# Altium PCB Плата 0312-1546 2.PcbDoc
Units mm, origin at the board's own origin, x right, y up, seen from the top; angles counter-clockwise.
Board outline 112 x 83.5 mm, 2 copper layers (Top Layer, Bottom Layer); 95 components, 62 nets, 367 pads, 73 vias.
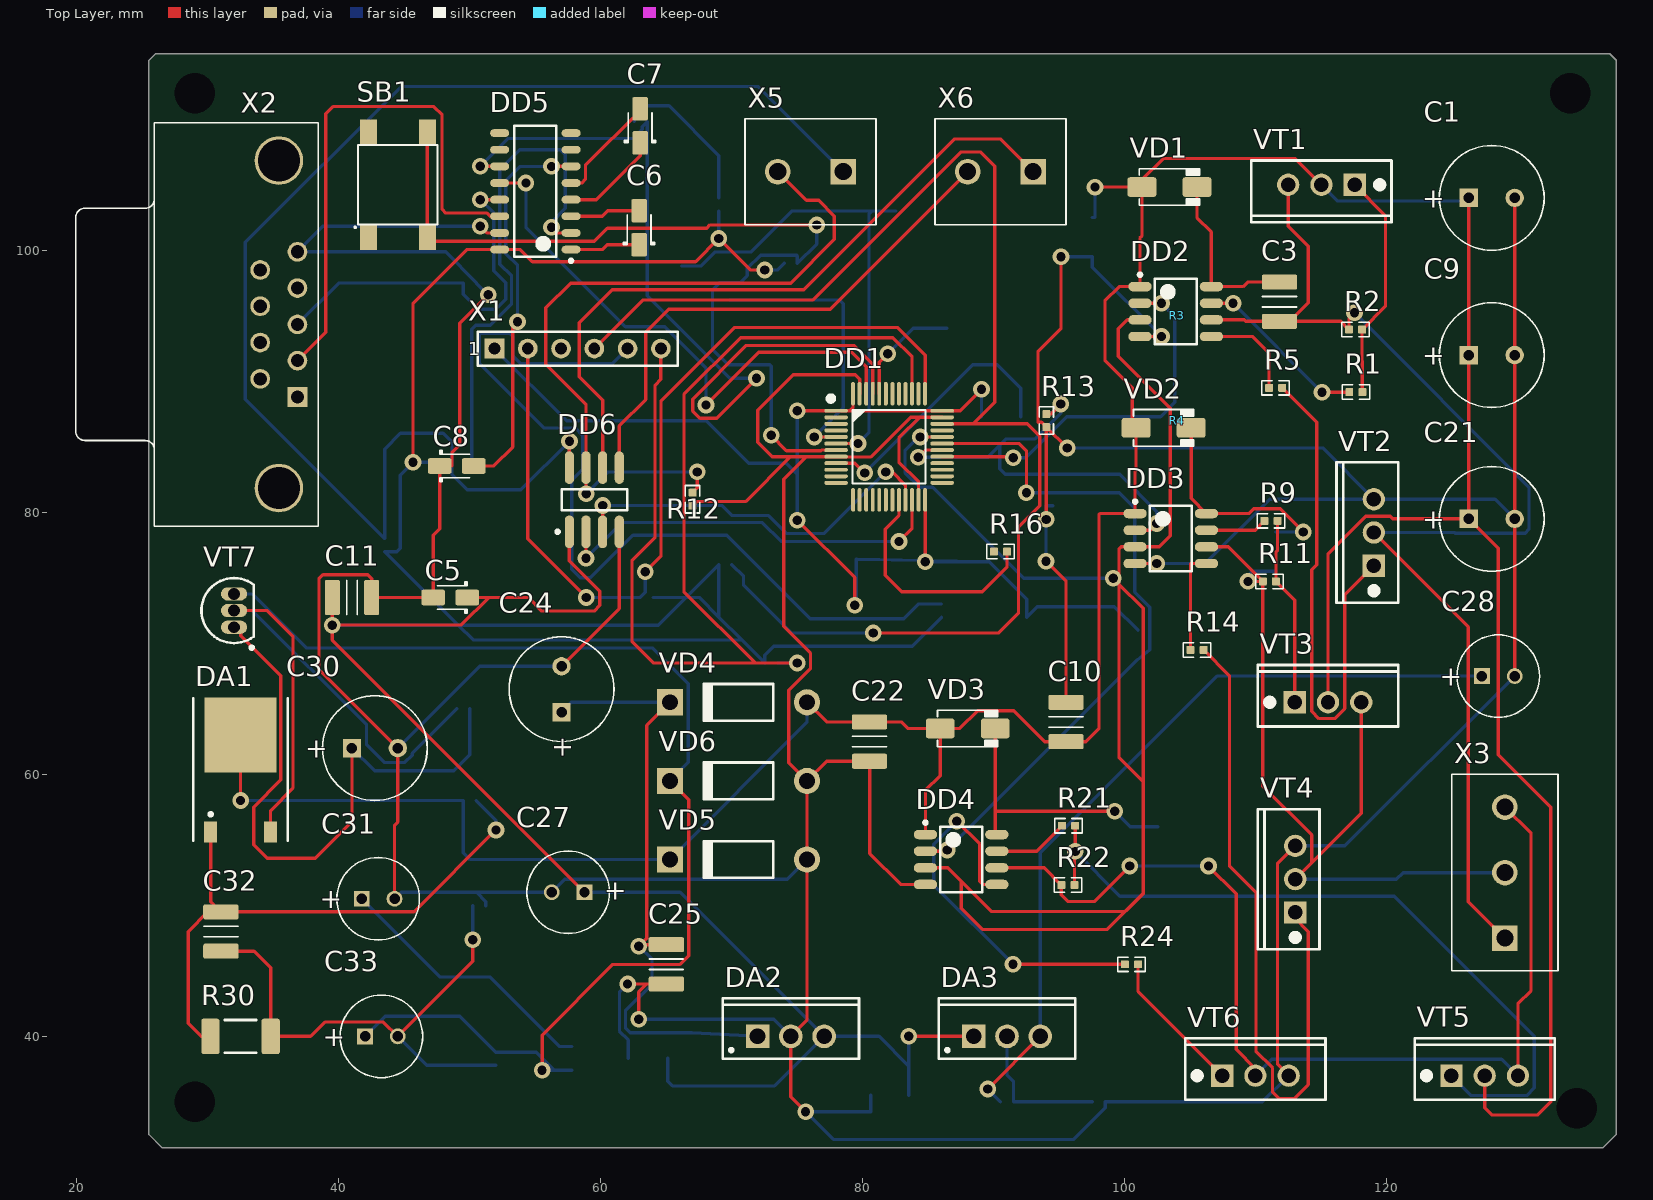
[diagram p0: Top Layer view]
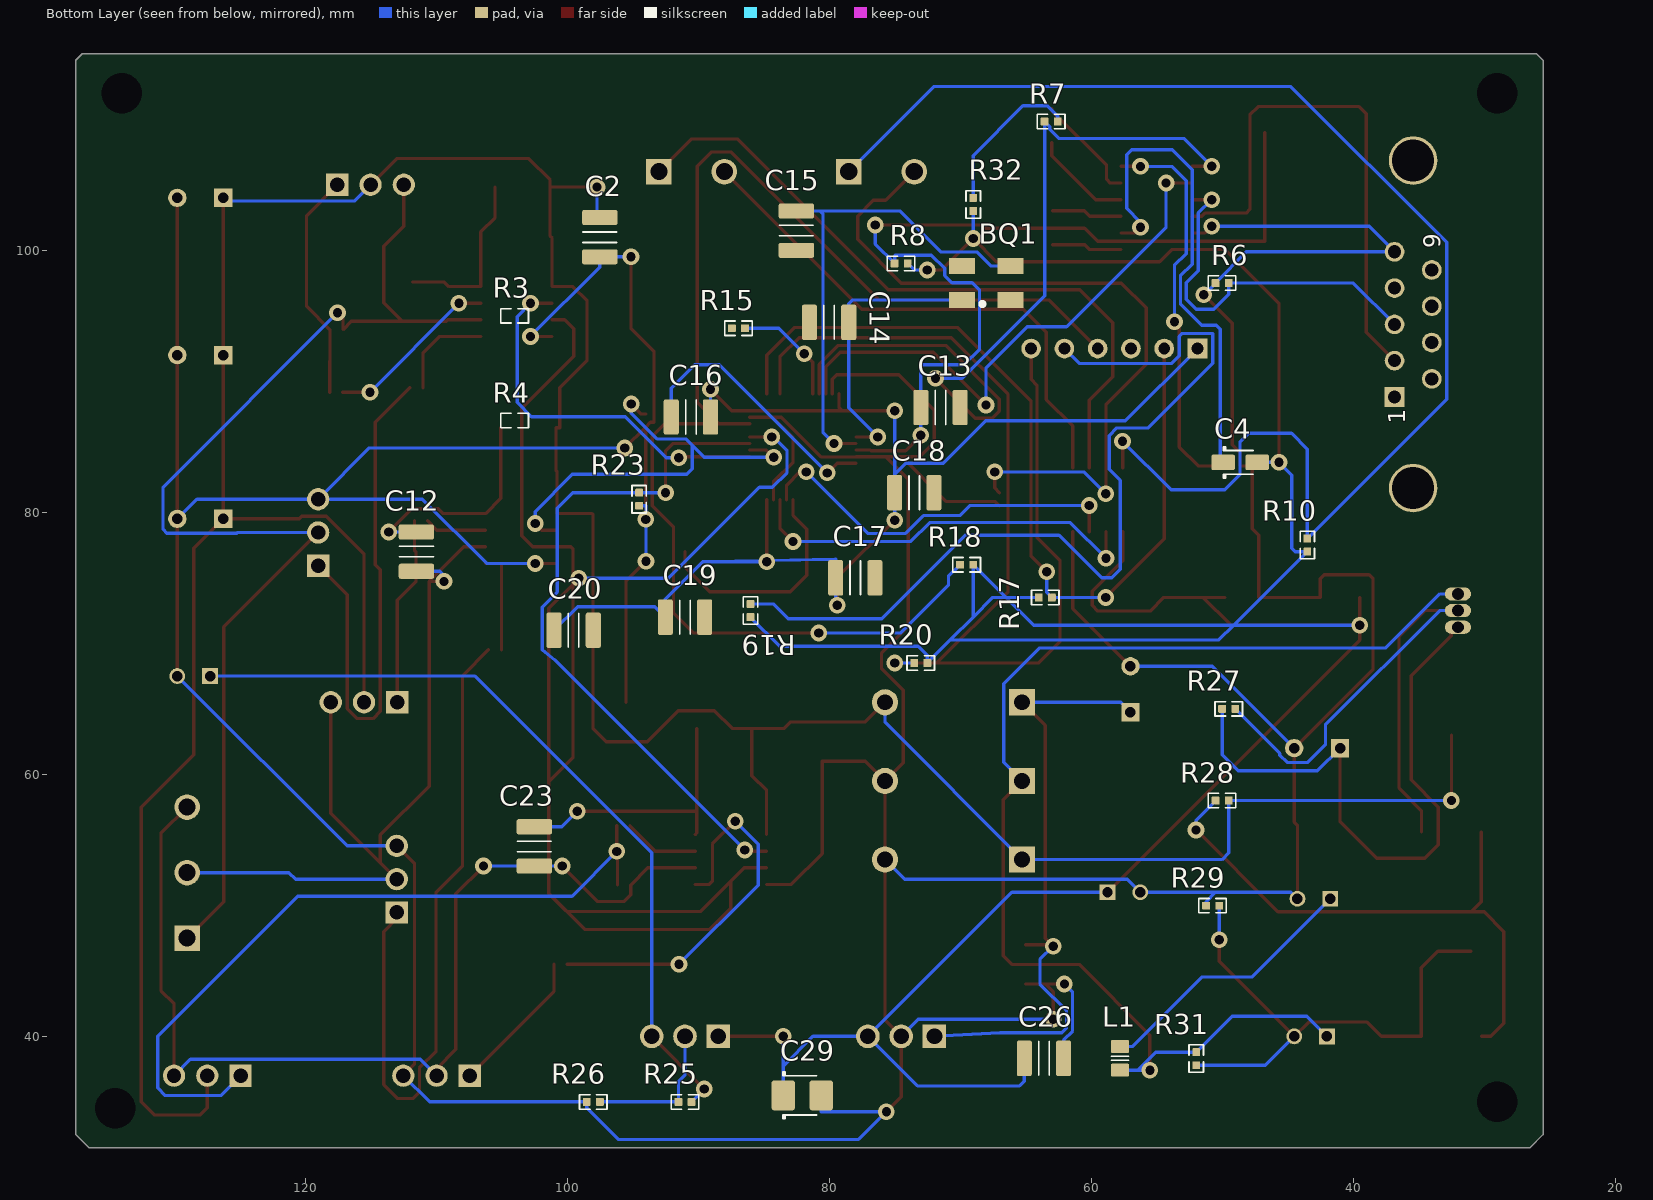
[diagram p1: Bottom Layer view, seen from below]
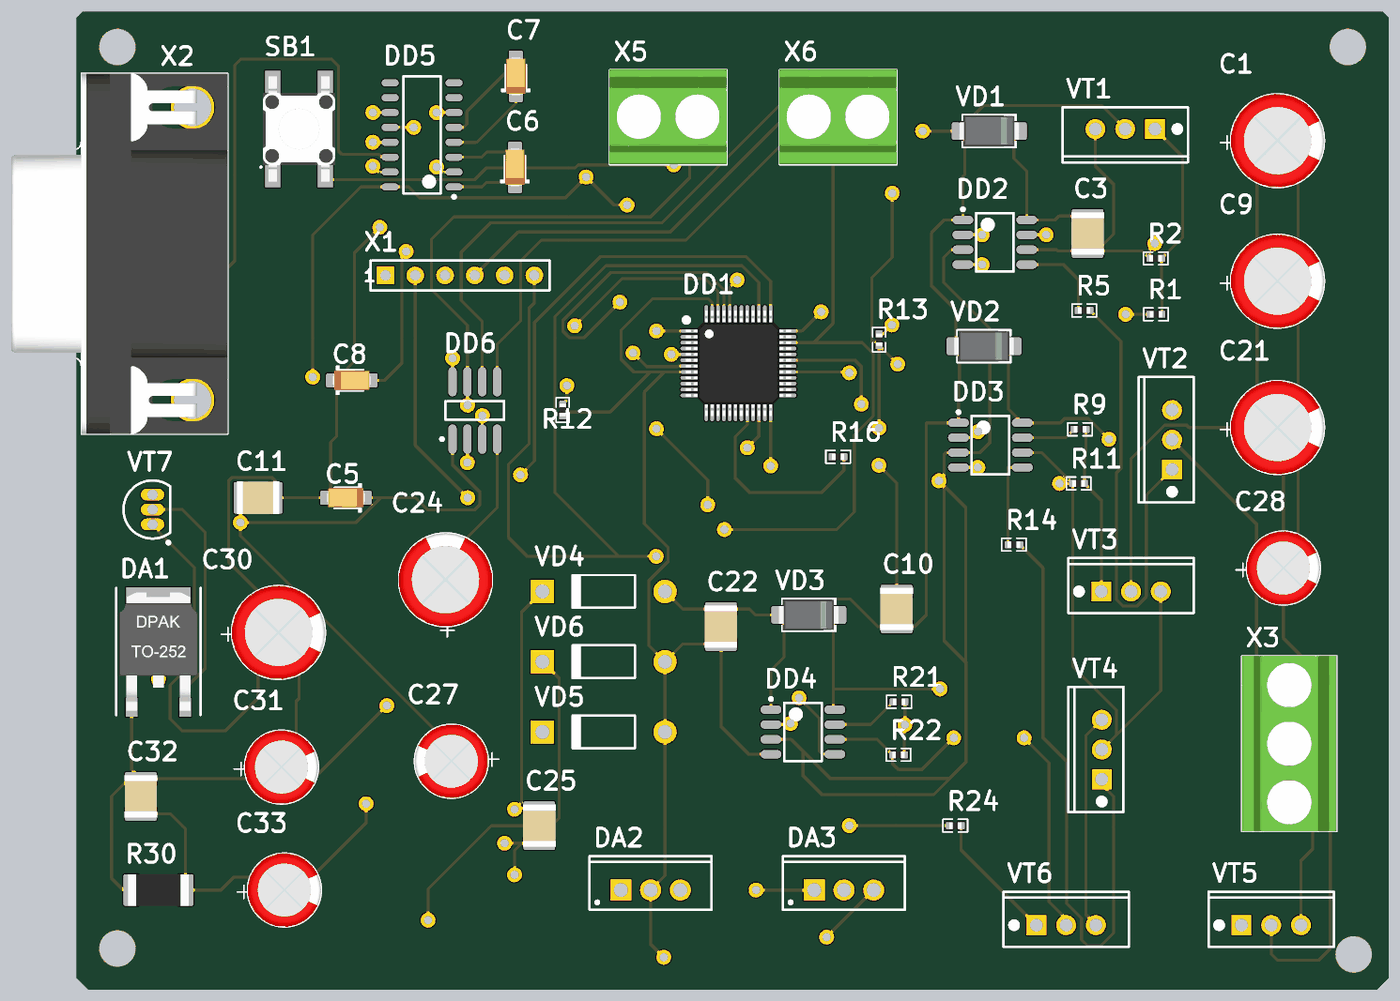
[diagram p2: 3D render of the assembled board from above, using the file's embedded part models]
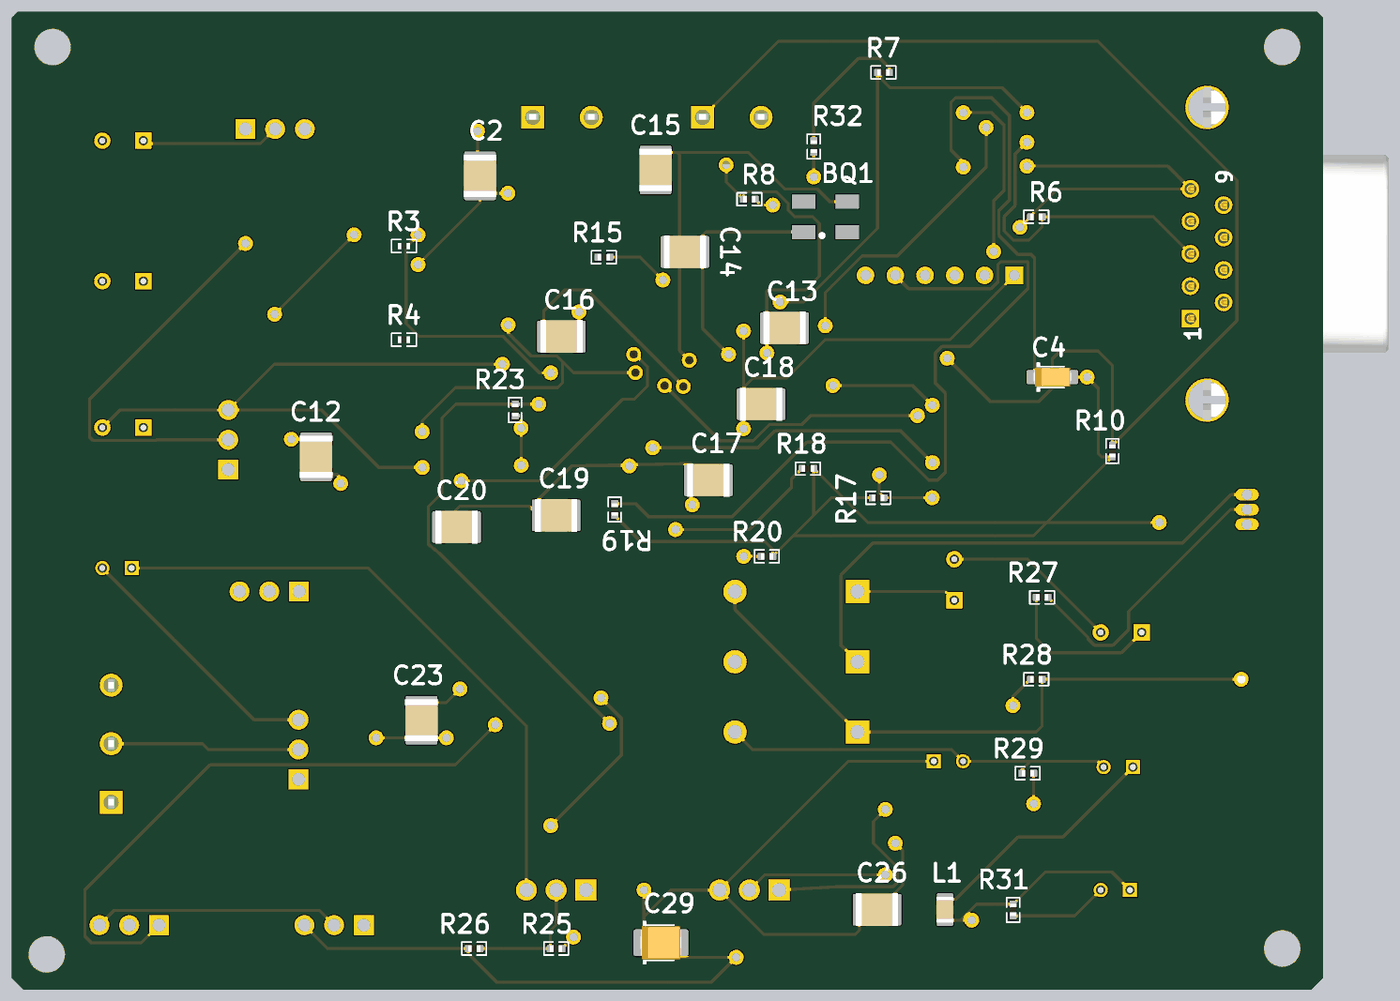
[diagram p3: 3D render of the assembled board from below, using the file's embedded part models]

## Layer stack, top to bottom
Top Solder: solder mask 0.0102, Solder Resist, Dk 3.5
Top Layer: signal copper 0.0356
Dielectric 1: dielectric 0.32, FR-4, Dk 4.8
Bottom Layer: signal copper 0.0356
Bottom Solder: solder mask 0.0102, Solder Resist, Dk 3.5

## Board outline
25.5,32.5 25.5,38 25.5,114.5 26,115 137,115 137.5,114.5 137.5,32.5 136.5,31.5 26.5,31.5

## Design rules (kind name [scope] priority, off if disabled: settings)
Clearance [All] p1: gap=0.254 ignorepadtopadclearanceinfootprint=TRUE except(0: Arc-Hole Track-Hole SMDPad-Hole THPad-Hole Via-Hole Fill-Hole Poly-Hole Region-Hole Text-Hole; 0.2: Arc-Arc Arc-Track Arc-SMDPad Track-Track Track-SMDPad SMDPad-SMDPad)
DiffPairsRouting [All] p1 off: maxlimit=0.254 minlimit=0.254 mostfreqgap=0.254 toplayer_minwidth=0.381 toplayer_maxwidth=0.381 toplayer_prefwidth=0.381 bottomlayer_minwidth=0.381 bottomlayer_maxwidth=0.381 bottomlayer_prefwidth=0.381 maxuncoupledlength=12.7
PolygonConnect [All] p1: connectstyle=Relief reliefconductorwidth=0.254 reliefentries=4 polygonreliefangle="90 Angle" airgapwidth=0.254
RoutingVias [All] p1: holewidth=0.711 width=1.27 viastyle="Through Hole" minholewidth=0.711 minwidth=1.27 maxholewidth=0.711 maxwidth=1.27
SolderMaskExpansion [All] p1: expansion=0.102
Width [All] p1: maxlimit=0.254 minlimit=0.254 preferedwidth=0.254
29 further rules are at their usual default settings.

## Components (designator, comment, footprint, x,y, rotation, side; value= is the part's Value field where it differs from the comment)
BQ1 "8МГц" SMD0503_BQ 68,97.5 r180 bottom
C1 "220мк" "WCAP-ATUL 8x11.5x3.5x0.5" 128,104 r0 top
C2 "0,1мк" CAPC3225X220N 97.5,101 r270 bottom
C3 "15мк" CAPC3225X220N 111.8,96.075 r270 top
C4 "1мк" CAPMP3216X180N 48.625,83.812 r180 bottom
C5 "1мк" CAPMP3216X180N 48.5,73.5 r180 top
C6 "1мк" CAPMP3216X180N 62.925,101.725 r90 top
C7 "1мк" CAPMP3216X180N 63,109.5 r90 top
C8 "1мк" CAPMP3216X180N 49,83.537 r0 top
C9 "220мк" "WCAP-ATUL 8x11.5x3.5x0.5" 128,92 r0 top
C10 "0,1мк" CAPC3225X220N 95.5,64 r90 top
C11 "0,1мк" CAPC3225X220N 41,73.5 r180 top
C12 "15мк" CAPC3225X220N 111.5,77 r270 bottom
C13 "10мк" CAPC3225X220N 71.5,88 r180 bottom
C14 "22" CAPC3225X220N 80,94.5 r0 bottom
C15 "22" CAPC3225X220N 82.5,101.5 r270 bottom
C16 "0,1мк" CAPC3225X220N 90.55,87.275 r180 bottom
C17 "0,1мк" CAPC3225X220N 78,75 r180 bottom
C18 "0,1мк" CAPC3225X220N 73.5,81.5 r180 bottom
C19 "0,1мк" CAPC3225X220N 91,72 r180 bottom
C20 "0,1мк" CAPC3225X220N 99.5,71 r180 bottom
C21 "220мк" "WCAP-ATUL 8x11.5x3.5x0.5" 128,79.5 r0 top
C22 "0,1мк" CAPC3225X220N 80.5,62.5 r270 top
C23 "15мк" CAPC3225X220N 102.5,54.5 r270 bottom
C24 "220мк" "WCAP-ATUL 8x11.5x3.5x0.5" 57,66.5 r90 top
C25 "0,1мк" CAPC3225X220N 65,45.5 r270 top
C26 "0,1мк" CAPC3225X220N 63.6,38.325 r180 bottom
C27 "100мк" "WCAP-ATUL 6.3x11x2.5x0.5" 57.5,51 r180 top
C28 "100мк" "WCAP-ATUL 6.3x11x2.5x0.5" 128.5,67.5 r0 top
C29 "10мк" CAPMP3528X210N 82.05,35.5 r180 bottom
C30 "100 мк" "WCAP-ATUL 8x11.5x3.5x0.5" 42.75,62 r0 top
C31 "100 мк" "WCAP-ATUL 6.3x11x2.5x0.5" 43,50.5 r0 top
C32 "0,01 мк" CAPC3225X220N 31,48 r270 top
C33 "330 мк" "WCAP-ATUL 6.3x11x2.5x0.5" 43.25,40 r0 top
DA1 "LM317D2T-TR" 369A-13 32.5,59.3 r0 top
DA2 "L78S05CV" TO220FP 74.5,40 r0 top
DA3 "LM317AT/NOPB" TO220FP 91,40 r0 top
DD1 "STM32F103C8T6" LQFP-48_N 82,85 r0 top
DD2 "IR2184SPBF" IR2184SPBF 103.875,95.325 r0 top
DD3 "IR2184SPBF" IR2184SPBF 103.5,78 r0 top
DD4 "IR2184SPBF" IR2184SPBF 87.5,53.5 r0 top
DD5 "MAX232EPE" ST232BDR 55,104.5 r180 top
DD6 "SN75179BD" PCBComponent_1#1 59.5,81 r90 top
L1 "B82432-A1684-K" CAPC2012X135N 57.8,38.325 r90 bottom
R1 "10" RES0402#1 117.625,89.175 r0 top
R2 "10к" RES0402#1 117.6,93.95 r0 top
R3 "100к" RES0402#2 104,95 r180 top
R4 "100к" RES0402#2 104,87 r180 top
R5 "10" RES0402#1 111.5,89.5 r0 top
R6 "5,1к" RES0402#1 50,97.5 r180 bottom
R7 "200к" RES0402#1 63.05,109.825 r180 bottom
R8 "4,7к" RES0402#1 74.5,99 r180 bottom
R9 "10" RES0402#1 111.15,79.35 r0 top
R10 "4,7к" RES0402#1 43.5,77.5 r270 bottom
R11 "10к" RES0402#1 111.025,74.725 r0 top
R12 "4,7к" RES0402#1 67,81 r90 top
R13 "100к" RES0402#1 94,87 r90 top
R14 "10" RES0402#1 105.5,69.5 r0 top
R15 "1к" RES0402#1 86.925,94.05 r180 bottom
R16 "1к" RES0402#1 90.5,77 r0 top
R17 "4,7к" RES0402#1 63.5,73.5 r0 bottom
R18 "4,7к" RES0402#1 69.5,76 r180 bottom
R19 "4,7к" RES0402#1 86,72.5 r270 bottom
R20 "4,7к" RES0402#1 73,68.5 r180 bottom
R21 "10" RES0402#1 95.7,56.075 r0 top
R22 "10к" RES0402#1 95.65,51.55 r0 top
R23 "100к" RES0402#1 94.5,81 r90 bottom
R24 "10" RES0402#1 100.5,45.5 r0 top
R25 "240" RES0402#1 91,35 r180 bottom
R26 "390" RES0402#1 98,35 r180 bottom
R27 "22" RES0402#1 49.5,65 r180 bottom
R28 "240" RES0402#1 50,58 r180 bottom
R29 "100" RES0402#1 50.725,49.975 r180 bottom
R30 "2к" RES2010 32.5,40 r180 top
R31 "15к" RES0402#1 51.975,38.3 r90 bottom
R32 "200к" RES0402#1 69,103.5 r270 bottom
SB1 "SWT-34" SWT-34 44.5,105 r90 top
VD1 "VS-10MQ100-M3/5AT" DO-214AC 103.4,104.825 r0 top
VD2 "VS-10MQ100-M3/5AT" DO-214AC 102.95,86.45 r0 top
VD3 "VS-10MQ100-M3/5AT" DO-214AC 88,63.5 r0 top
VD4 "1N4007" DO-41 70.5,65.5 r180 top
VD5 "1N4007" DO-41 70.5,53.5 r180 top
VD6 "КД213А" DO-41 70.5,59.5 r180 top
VT1 "IRF1010NPBF" TO-220 115,105 r180 top
VT2 "IRF1010NPBF" TO-220 119,78.46 r90 top
VT3 "IRF1010NPBF" TO-220 115.5,65.5 r0 top
VT4 "IRF1010NPBF" TO-220 113,52 r90 top
VT5 "IRF1010NPBF" TO-220 127.46,37 r0 top
VT6 "IRF1010NPBF" TO-220 109.96,37 r0 top
VT7 "КТ818 (КТ825)" TO-92A 32,72.5 r0 top
X1 "PLS-1x6" PCBComponent_1#2 56.96,92.5 r0 top
X2 "DRB-9FB" DSUB1.385-2H9 35.42,81.845 r90 top
X3 "301-031-12" 301-031-12_3D 129,52.5 r90 top
X5 "301-021-12" 301-021-12_3D 76,106 r180 top
X6 "301-021-12" 301-021-12_3D 90.5,106 r180 top

## Footprints (in the part's own frame and the unit in brackets; to place one, negate y for a bottom-side part, rotate by r counter-clockwise, add the part's x,y. Pads: shape width x height; smd on the part's side, far side on the other; paste and mask are expansions set on the pad)
301-021-12_3D [mm] "Serie 2417 - 5.00 mm _ 2 pins"
  rect 1.95x1.95 hole 1.3: 1(-2.5,0)
  round 1.95 hole 1.3: 2(2.5,0)
  silkscreen extent -5,-4.05 5,4.05, body extent -5,-4.1 5,4, height 10.1
301-031-12_3D [mm] "Serie 2417 - 5.00 mm _ 3 pins"
  rect 1.95x1.95 hole 1.3: 1(-5,0)
  round 1.95 hole 1.3: 2(0,0) 3(5,0)
  silkscreen extent -7.5,-4.05 7.5,4.05, body extent -7.5,-4.05 7.5,4.05, height 10.1
369A-13 [mm] "D-PAK/TO-252-AA; 3 Leads (1 Cropped); Body 10.3 (inc. leads) x 6.7 mm (LxW max)"
  rect 1x1.6 smd: 1(-2.285,-3.7) 3(2.285,-3.7)
  rect 5.5x5.7 smd: 4(0,3.7)
  silkscreen extent -3.6,-4.35 3.6,6.5, body extent -3.37,-4 3.37,6.1, height 2.38
CAPC2012X135N [mm] "Chip Capacitor, Body 2.0x1.2mm, EIA 0805, IPC Medium Density"
  round 0.254 on Mech15: 0(0,0)
  rrect25% 1x1.4 smd: 1(-0.9,0) 2(0.9,0)
  Top Layer pour cut-out: -0.675,0.7 -0.475,0.9 0.475,0.9 0.675,0.7 0.675,-0.7 0.475,-0.9 -0.475,-0.9 -0.675,-0.7
  silkscreen extent -0.15,-0.65 0.15,0.65, body extent -1.1,-0.72 1.1,0.73, height 1.34
CAPC3225X220N [mm] "Chip Capacitor, Body 3.2x2.5mm, EIA 1210, IPC Medium Density"
  round 0.508 on Mech15: 0(0,0)
  rrect25% 1.15x2.7 smd: 1(-1.5,0) 2(1.5,0)
  silkscreen extent -0.4,-1.3 0.4,1.3, body extent -1.8,-1.4 1.8,1.4, height 2.19
CAPMP3216X180N [mm] "Capacitor, polarized, Molded Body, EIA 535BAAC size A; 3.20mm L X 1.60mm W X 1.80mm H"
  round 0.508 on Mech15: 0(0,0)
  rrect25% 1.8x1.2 smd: 1(-1.3,0) 2(1.3,0)
  silkscreen extent -1.3,-1.2 1,1.2, body extent -1.6,-0.8 1.6,0.8, height 1.8
CAPMP3528X210N [mm] "Molded body capacitor, Body 3.5x2.8mm, 1210, IPC Nominal settings"
  round 0.254 on Mech15: 0(0,0)
  rrect25% 1.8x2.3 smd: 1(-1.45,0) 2(1.45,0)
  Top Layer pour cut-out: -0.508,1.27 0.508,1.27 0.508,-1.27 -0.508,-1.27
  silkscreen extent -1.5,-1.8 1.1,1.8, body extent -1.75,-1.4 1.75,1.4, height 2.1
DO-41 [mm] "Diode, Axial; Body 5.2 x 2.7 mm (LxDia. max), Lead Dia. 0.86 mm (max)"
  round 2 hole 1.2: 1(-5.23,0)
  rect 2x2 hole 1.2: 2(5.23,0)
  silkscreen extent -2.65,-1.4 2.75,1.4
DO-214AC [mm] "JEDEC DO214 variation AC. SMA"
  round 0.508 on Mech15: 0(0,0)
  rrect25% 2.2x1.5 smd: 1(-2.1,0) 2(2.1,0)
  silkscreen extent -2.3,-1.4 2.3,1.4, body extent -2.6,-1.3 2.6,1.3, height 2.42
DSUB1.385-2H9 [mm] "Connector; D Subminiature; 9 Position; Right Angle; Pitch 1.385 mm"
  rect 1.5x1.5 hole 1: 1(6.96,-1.42)
  round 1.5 hole 1: 2(9.73,-1.42) 3(12.5,-1.42) 4(15.27,-1.42) 5(18.04,-1.42) 6(8.345,1.42) 7(11.115,1.42) 8(13.885,1.42) 9(16.655,1.42)
  round 3.7 hole 3.2: Z1(25,0) Z2(0,0)
  silkscreen extent -2.9,-3 27.9,15.5, body extent -2.9,-3 27.9,15.5, height 12.51
IR2184SPBF [mm] "SOIC, 8-Leads, Body 4,90x3,90mm, Pitch 1,27mm, IPC Medium Density"
  oval 1.78x0.72 smd: 1(-2.725,1.905) 2(-2.725,0.635) 3(-2.725,-0.635) 4(-2.725,-1.905) 5(2.725,-1.905) 6(2.725,-0.635) 7(2.725,0.635) 8(2.725,1.905)
  silkscreen extent -2.85,-2.5 1.6,2.94, body extent -2,-2.5 2,2.5, height 1.75
LQFP-48_N [mm] "Thin QFP, 48-Leads, Body 7x7mm, Pitch 0.5mm, IPC Medium Density"
  round 1 on Mech15: 0(0,0)
  oval 1.8x0.3 smd: 1(-4.05,2.75) 2(-4.05,2.25) 3(-4.05,1.75) 4(-4.05,1.25) 5(-4.05,0.75) 6(-4.05,0.25) 7(-4.05,-0.25) 8(-4.05,-0.75) 9(-4.05,-1.25) 10(-4.05,-1.75) 11(-4.05,-2.25) 12(-4.05,-2.75) 25(4.05,-2.75) 26(4.05,-2.25) 27(4.05,-1.75) 28(4.05,-1.25) 29(4.05,-0.75) 30(4.05,-0.25) 31(4.05,0.25) 32(4.05,0.75) 33(4.05,1.25) 34(4.05,1.75) 35(4.05,2.25) 36(4.05,2.75)
  oval 0.3x1.8 smd: 13(-2.75,-4.05) 14(-2.25,-4.05) 15(-1.75,-4.05) 16(-1.25,-4.05) 17(-0.75,-4.05) 18(-0.25,-4.05) 19(0.25,-4.05) 20(0.75,-4.05) 21(1.25,-4.05) 22(1.75,-4.05) 23(2.25,-4.05) 24(2.75,-4.05) 37(2.75,4.05) 38(2.25,4.05) 39(1.75,4.05) 40(1.25,4.05) 41(0.75,4.05) 42(0.25,4.05) 43(-0.25,4.05) 44(-0.75,4.05) 45(-1.25,4.05) 46(-1.75,4.05) 47(-2.25,4.05) 48(-2.75,4.05)
  silkscreen extent -4.64,-2.79 2.79,3.88, body extent -4.5,-4.5 4.5,4.5, height 1.59
PCBComponent_1#1 [mm]
  oval 2.5x0.7 smd: 1(-2.487,1.905) 2(-2.487,0.635) 3(-2.487,-0.635) 4(-2.487,-1.905) 5(2.413,-1.905) 6(2.413,-0.635) 7(2.413,0.635) 8(2.413,1.905)
  silkscreen extent -2.61,-2.5 0.76,2.93, body extent -2.04,-2.5 1.96,2.5, height 1.75
PCBComponent_1#2 [mm]
  rect 1.5x1.5 hole 0.9: 1(-5.08,0)
  round 1.5 hole 0.9: 2(-2.54,0) 3(0,0) 4(2.54,0) 5(5.08,0) 6(7.62,0)
  silkscreen extent -6.35,-1.3 8.92,1.27
RES0402#1 [mm] "Chip Resistor, Body 1.0x0.5mm, EIA 0402, IPC Medium Density"
  round 0.2 on Mech15: 0(0,0)
  rrect20% 0.6x0.6 smd: 1(-0.5,0) 2(0.5,0)
  Top Layer pour cut-out: -0.325,0.375 -0.2,0.5 0.2,0.5 0.325,0.375 0.325,-0.375 0.2,-0.5 -0.2,-0.5 -0.325,-0.375
  silkscreen extent -1.05,-0.55 1.05,0.55, body extent -0.52,-0.27 0.53,0.28, height 0.4
RES0402#2 [mm] "Chip Resistor, Body 1.0x0.5mm, EIA 0402, IPC Medium Density"
  round 0.2 on Mech15: 0(0,0)
  rrect20% 0.6x0.6 on Mech1: 1(-0.5,0) 2(0.5,0)
  body extent -0.52,-0.28 0.53,0.27, height 0.4
RES2010 [mm] "Chip Resistor, Body 5.0x2.5mm, 2010, IPC Medium Density"
  round 0.508 on Mech15: 0(0,0)
  rrect25% 1.4x2.7 smd: 1(-2.3,0) 2(2.3,0)
  silkscreen extent -1.2,-1.25 1.2,1.25, body extent -2.6,-1.35 2.6,1.35, height 0.69
SMD0503_BQ [mm]
  rect 2x1.2 smd: 1(-1.85,-1.3) 2(1.85,-1.3) 3(1.85,1.3) 4(-1.85,1.3)
  silkscreen extent -0.45,-1.75 -0.15,-1.45, body extent -2.5,-1.6 2.5,1.6, height 1
ST232BDR [mm]
  oval 1.45x0.6 smd: 1(-2.725,4.445) 2(-2.725,3.175) 3(-2.725,1.905) 4(-2.725,0.635) 5(-2.725,-0.635) 6(-2.725,-1.905) 7(-2.725,-3.175) 8(-2.725,-4.445) 9(2.725,-4.445) 10(2.725,-3.175) 11(2.725,-1.905) 12(2.725,-0.635) 13(2.725,0.635) 14(2.725,1.905) 15(2.725,3.175) 16(2.725,4.445)
  silkscreen extent -2.85,-5 1.6,5.42, body extent -2,-5 2,5, height 2.65
SWT-34 [mm] "6*6mm vertical type, SMD, height 4.3mm, black actuator, 160gf, T&R"
  rect 2x1.3 smd: 1(-3.975,2.25) 2(3.975,2.25) 3(-3.975,-2.25) 4(3.975,-2.25)
  silkscreen extent -3.29,-3.04 3.04,3.29, body extent -4.5,-3.1 4.5,3.1, height 4.29
TO220FP [mm] "TO, Thru-Hole, Vertical, Heatsink Mounted; 3 In-Line Leads; Pitch 2.54 mm"
  rect 1.8x1.8 hole 1.2: 1(-2.54,0)
  round 1.8 hole 1.2: 2(0,0) 3(2.54,0)
  silkscreen extent -5.2,-1.7 5.2,2.9, body extent -5.25,-1.75 5.25,2.95, height 20
TO-92A [mm] "TO, Flat Index; 3 In-Line, Axial Leads; Body Dia. 4.5mm; Leads 0.51 x 0.48 mm (max)"
  oval 2x1 hole 0.9: 1(0,-1.27) 2(0,0) 3(0,1.27)
  silkscreen extent -2.48,-2.95 1.5,2.48, body extent -2.48,-2.5 1.5,2.5, height 6.86
TO-220 [mm] "TO, Thru-Hole, Vertical, Heatsink Mounted; 3 In-Line Leads; Pitch 2.54 mm"
  rect 1.7x1.7 hole 1.1: 1(-2.54,0)
  round 1.7 hole 1.1: 2(0,0) 3(2.54,0)
  silkscreen extent -5.35,-1.85 5.35,2.85
"WCAP-ATUL 6.3x11x2.5x0.5" [mm] "Polarized capacitors, Aluminum Electrolytic Capacitors, 2-Leads, Body 6.3x11x2.5x0.5"
  rect 1.206x1.206 hole 0.8: 1(-1.25,0)
  round 1.206 hole 0.8: 2(1.25,0)
  silkscreen extent -3.15,-3.15 3.15,3.15, body extent -3.12,-3.13 3.14,3.15, height 19.51
"WCAP-ATUL 8x11.5x3.5x0.5" [mm] "Polarized capacitors, Aluminum Electrolytic Capacitors, 2-Leads, Body 8x11.5x3.5x0.5"
  rect 1.4x1.4 hole 0.8: 1(-1.75,0)
  round 1.4 hole 0.8: 2(1.75,0)
  silkscreen extent -4,-4 4,4, body extent -3.97,-3.98 3.99,4, height 11.76

## Part data
BQ1: library part SMD0503, "Кварцевый резонатор", ValueManufacturer=Китай, ValueDescription="Кварцевый резонатор", ValueManufacturerPartNumber=SMD0503, ValueType=SMD0503, ValueValue=8МГц
C1 C4 C5 C6 C7 C8 C9 C21 C24 C27 C28 C29 C30 C31 C33: library part Сapacitor_Pol, "Сapacitor_Pol", ValueDescription="Конденсатор полярный", ValueManufacturerPartNumber="\"\" -", ValueType_TU=Конденсаторы
C2 C3 C10 C11 C12 C13 C14 C15 C16 C17 C18 C19 C20 C22 C23 C25 C26 C32: library part Сapacitor, "Сapacitor", ValueDescription=Конденсатор, ValueManufacturerPartNumber="\"\" -", ValueType_TU=Конденсаторы
DA1: library part MC33269DT-3.3G, "Регулятор с малым падением напряжения, 800мА, 3.3В", ValueDescription="DC-DC регулятор", ValueManufacturer="ON Semiconductor", ValuePackage=369A-13, ValueManufacturerPartNumber=MC33269DT-3.3G, ValueType=MC33269DT-3.3G
DA2 DA3: library part L7805ABV, "Регулятор положительного напряжения, 1.5А, 5В", ValueDescription="Регулятор положительного напряжения", ValueManufacturer="ST Microelectronics", ValueManufacturerPartNumber=L7805ABV, ValueType=L7805ABV
DD1: "ARM Cortex-M3 32-bit MCU, 128 KB Flash, 20 KB Internal RAM, 37 I/Os, 48-pin LQFP, -40 to 85 degC, Tray", I/Os (High Current)=37, Operating Frequency(F) (Processor speed) (MHz)=72, Supplier Part Number 1=1606327, Supply Voltage(Vcc) min (V)=2, ValueManufacturer=STMicroelectronics, A/D Converter="2x12-bit (10 Channel)", ComponentLink1Description="Manufacturer URL", ComponentLink1URL=http://www.st.com/web/en/home.html, ComponentLink2Description=Datasheet, ComponentLink2URL=http://www.st.com/st-web-ui/static/active/en/resource/technical/document/datasheet/CD00161566.pdf, ComponentLink3Description="Package Specification", ComponentLink3URL=http://www.st.com/st-web-ui/static/active/en/resource/technical/document/datasheet/DM00058181.pdf, Core="ARM Cortex-M3", DatasheetVersion="Rev. 16", FLASH Size (Prog) (kB)=64, Internal RAM Size (kB)=20, Mounting Technology="Surface Mount", PackageDescription="48-Pin Low Profile Quad Flat Package, 7 x 7 mm Body, 0.5 mm Pitch", PackageReference=LQFP48, PackageVersion="Rev. 6, 06/2013", Packing=Tray, PartNumber=STM32F103C8T6, Supplier 1=Farnell, Supplier 2=Newark, Supplier 3=Newark, Supplier Part Number 2=11N8296, Supplier Part Number 3=57P1214, ValueManufacturerPartNumber=STM32F103C8T6, ValueType=STM32F103C8T6
DD2 DD3 DD4: library part Component_1
DD5: library part ST232BDR
DD6: "Дифференциальный драйвер и ресивер двухпроводной линии (RS-422)", ValueManufacturer="Texas Instruments", ValuePackage=SO-8, ValueDescription="Дифференциальный драйвер и ресивер двухпроводной линии (RS-422)", ValueManufacturerPartNumber=SN75179BD, ValueType=SN75179BD
L1: library part BLM21AG102SN1, "Дроссель подавления ЭМП", ValueCurrent="0,2 А", ValueManufacturer="Murata Manufacturing", ValuePackage=0805, ValueValue="20 мГн", ValueDescription="Дроссель подавления ЭМП", ValueManufacturerPartNumber=BLM21AG102SN1, ValueType=BLM21AG102SN1
R1 R2 R3 R4 R5 R6 R7 R8 R9 R10 R11 R12 R13 R14 R15 R16 R17 R18 R19 R20 R21 R22 R23 R24 R25 R26 R27 R28 R29 R30 R31 R32: library part Resistor, "Резистор", ValueManufacturerPartNumber="\"\" -", ValueType_TU=Резисторы, ValueDescription=Резистор
SB1: "Тактовый переключатель SMD h=7мм (SDTM-630-N) (TS-06M-CSM)", ValueDescription="Кнопка тактовая", ValueManufacturer=Тайвань, ValueManufacturerPartNumber=SWT-34, ValuePackage=SWT-34, ValueType=SWT-34
VD1 VD2 VD3: "Диод Шоттки 2.1А 100В", ValueCurrent=2,1А, ValueManufacturer="Fairchild Semiconductor", ValueMaxReverseVoltage=100В, ValuePackage=DO-214AC, ValueDescription="Диод Шоттки 2.1А 100В", ValueManufacturerPartNumber=VS-10MQ100-M3/5AT, ValueType=VS-10MQ100-M3/5AT
VD4 VD5 VD6: library part "Diode 1N4007", "1 Amp General Purpose Rectifier", Code_JEDEC=DO-204-AL, ComponentLink1Description="Manufacturer Link", ComponentLink1URL=http://www.fairchildsemi.com/, ComponentLink2Description=Datasheet, ComponentLink2URL=http://www.fairchildsemi.com/ds/1N%2F1N4001.pdf, DatasheetVersion=1998, LatestRevisionDate=17-Jul-2002, LatestRevisionNote="Re-released for DXP Platform.", PackageDescription="Diode, Axial; Body 5.2 x 2.7 mm (LxDia. max), Lead Dia. 0.86 mm (max)", PackageReference=DO-41, PackageVersion=Aug-1999, Published=8-Jun-2000, Publisher="Altium Limited"
VT1 VT2 VT3 VT4 VT5 VT6: library part IRLML0100TRPBF, "Транзистор, Nкан 100В 127А TO220AB", ValueCurrent=127А, ValueManufacturer="International Rectifier", ValueManufacturerPartNumber=IRFB4310PBF, ValuePackage=TO-220, ValueVoltage=100В, ValueDescription="Транзистор, Nкан 100В 127А TO220AB", ValueType=IRFB4310PBF
VT7: library part 2N3906, "PNP General Purpose Amplifier", ComponentLink1Description="Manufacturer Link", ComponentLink1URL=http://www.fairchildsemi.com/, ComponentLink2Description=Datasheet, ComponentLink2URL=http://www.fairchildsemi.com/ds/2N%2F2N3906.pdf, DatasheetVersion=1997, LatestRevisionDate=15-Jan-2003, LatestRevisionNote="PCB Footprint 'BCY-W3/D4.7' replaced", PackageDescription="TO, Flat Index; 3 In-Line, Axial Leads; Body Dia. 4.5mm; Leads 0.51 x 0.48 mm (max)", PackageReference=TO-92A, PackageVersion=Sep-1998, Published=8-Jun-2000, Publisher="Altium Limited"
X1: library part IDC-6MS, A1TXT=V_targ, A2TXT=SWCLK, A3TXT=GND, A4TXT=SWDIO, A5TXT=NRST, A6TXT=SWO, ValueManufacturerPartNumber=IDC-6MS, ValueType=IDC-6MS
X2: "Розетка 9 pin на плату 9.4мм", ValueManufacturer="Ningbo Zhenqin Electronic (Connfly Electronic)", A2TXT=Output, A3TXT=Input, A5TXT=GND, ValueDescription="Розетка 9 pin на плату 9.4мм", ValueManufacturerPartNumber=DRB-9FB, ValueType=DRB-9FB
X3: "Клеммник винтовой, 3-контактный, 5мм, прямой", ValueManufacturer="Ningbo Xinya M&E", A1TXT=PMW_A, A2TXT=PMW_B, A3TXT=PMW_C, ValueDescription="Клеммник винтовой, 3-контактный, 5мм, прямой", ValueManufacturerPartNumber=301-031-12, ValueType=301-031-12
X5 X6: "Клеммник винтовой, 2-контактный, 5мм, прямой", ValueManufacturer="Ningbo Xinya M&E", ValueDescription="Клеммник винтовой, 2-контактный, 5мм, прямой", ValueManufacturerPartNumber=301-021-12, ValueType=301-021-12
  X5: A1TXT=SIGN_A, A2TXT=SIGN_B
  X6: A1TXT=SIGN_Z, A2TXT=SIGN_Y

## Free pads (board coordinates)
  rect 0x0 hole 3.1: ""(29,35) ""(29,112) ""(134,112) ""(134.5,34.5)

## Via types
v1: diameter 1.27, hole 0.711, Top Layer to Bottom Layer, 73 vias

## Nets (pads, with @x,y where several pads share a name; then routed paths per layer and width w, separated by ;. In a path a pad name is that pad's centre, name@x,y a point inside that pad or via, vN(x,y) a via of type N, cw(c..) or ccw(c..) an arc to the next point about the centre after c; other vN are vias at no path point)
+3,3В: C28.1 DA3.3 R25.2 | length 60.4
  Top Layer w0.254: v1(89.52,35.98) DA3.3
  Bottom Layer w0.254: v1(89.52,35.98) R25.2 ; DA3.3 93.54,54.018 107.022,67.5 C28.1
+3.3В: C16.2 C17.1 C18.1 C19.1 C20.1 DD1.1 DD1.24 DD1.36 DD1.48 X1.1 | length 100.3
  Top Layer w0.254: v1(75,79.4) 79.375,75.025 v1(79.375,72.898) ; v1(75,87.75) DD1.1 78.994,87.75 ; DD1.48 79.25,88.006 78.994,87.75 ; v1(84.75,76.225) DD1.24 ; v1(89.052,89.383) 87.42,87.75 DD1.36 78.994,87.75
  Bottom Layer w0.254: X1.1 57.38,87 68.042,87 71.298,83.744 74.168,83.744 75,82.912 ; v1(75,79.4) C18.1 75,82.912 ; v1(75,87.75) 75,82.912 ; v1(79.375,72.898) 79.5,73.023 C17.1 79.5,76.429 79.529,76.428 84.752,76.324 89.655,76.225 ; v1(84.75,76.225) 89.655,76.225 ; C16.2 89.05,89.38 v1(89.052,89.383) ; C20.1 99.204,72.796 93.296,72.796 C19.1 92.5,73.381 89.655,76.225
+5В: C4.2 C5.1 C11.2 C26.1 C27.1 C29.1 DA2.3 DA3.1 DD5.16 DD6.1 R8.2 R10.2 R17.2 R18.2 R19.2 R20.2 R32.2 | length 265.6
  Top Layer w0.254: v1(45.663,83.812) 45.663,95.955 49.763,100.055 DD5.16 53.848,100.055 54.778,99.125 67.225,99.125 v1(69,100.901) 71.401,98.5 v1(72.5,98.5) ; C5.1 51.462,73.5 ; DD6.1 57.595,76.314 59.919,73.99 59.919,72.898 59.487,72.466 55.491,72.466 54.458,73.5 51.462,73.5 ; C27.1 39.5,70.25 v1(39.5,71.388) C11.2 39.511,71.399 49.361,71.399 51.462,73.5 ; v1(83.5,40) DA3.1
  Bottom Layer w0.254: v1(39.5,71.388) 49.112,71.388 ; C4.2 v1(45.663,83.812) 44.694,82.843 44.694,77.267 44.427,77 R10.2 49.112,71.388 ; C27.1 66.04,51 DA2.3 ; R17.2 66.5,73.5 ; C26.1 65.1,36.576 65.463,36.213 73.253,36.213 DA2.3 ; v1(69,100.901) R32.2 ; v1(72.5,98.5) 73.5,98.5 R8.2 ; C29.1 83.5,37.734 ; v1(83.5,40) 83.5,37.734 ; R19.2 83.765,69.765 73.177,69.765 72.5,69.088 R20.2 70.744,70.256 ; 49.112,71.388 64.388,71.388 66.5,73.5 ; 49.112,71.388 50.244,70.256 70.744,70.256 ; 66.5,73.5 67.5,73.5 69,72 ; 66.5,73.5 R18.2 69,72 ; 69,72 70.744,70.256 ; DA2.3 81.234,40 83.5,37.734
+12В: C1.1 C2.1 C9.1 C10.1 C21.1 C22.1 DA1.4 DD2.1 DD3.1 DD4.1 R28.2 VD1.1 VD2.1 VD3.1 VD4.1 VD5.2 VT1.2 VT3.2 VT5.2 | length 276.1
  Top Layer w0.254: v1(32.5,58) DA1.4 ; VD4.1 77.23,64 C22.1 82.931,64 83.431,63.5 VD3.1 ; DD4.1 84.775,58.775 85.9,59.9 VD3.1 ; v1(97.713,104.825) VD1.1 ; VT1.2 113,107 102.929,107 101.3,105.371 VD1.1 ; VT3.2 115.5,76.841 118.364,79.705 120.244,79.705 120.449,79.5 C21.1 ; C1.1 C9.1 C21.1 ; VT5.2 127.46,34.54 128,34 131.5,34 132.5,35 132.5,57.5 128.5,61.5 128.5,77.25 C21.1 ; VD3.1 87.401,63.5 88.764,64.862 91.525,64.862 93.888,62.5 C10.1 97.028,62.5 98.019,63.491 98.019,79.829 98.095,79.905 DD3.1 100.775,83.134 100.85,83.209 VD2.1 100.559,86.45 100.559,89.51 98.476,91.592 98.476,96.138 99.568,97.23 DD2.1 101.15,100.94 101.3,101.09 VD1.1
  Bottom Layer w0.254: v1(32.5,58) R28.2 49.5,54.005 50.005,53.5 VD5.2 75.73,63.96 VD4.1 ; C2.1 97.713,102.5 v1(97.713,104.825) ; VT1.2 116.241,103.759 126.009,103.759 C1.1
+27В: C30.1 R27.1 VT7.1 | length 47.7
  Top Layer w0.254: VT7.1 32.512,71.23 32.512,70.587 35.577,67.522 35.577,59.577 33.5,57.5 33.5,54.638 34.544,53.594 38.206,53.594 41,56.388 C30.1
  Bottom Layer w0.254: C30.1 42.726,60.274 48.768,60.274 50,61.506 R27.1
BOOT1: DD1.20 R16.2 | length 17.9
  Top Layer w0.254: DD1.20 82.75,79.756 81.712,78.718 81.712,75.184 82.956,73.939 89.099,73.939 91,75.84 R16.2
BOOTO: DD1.44 R15.2 | length 8.7
  Top Layer w0.254: DD1.44 81.25,91.461 v1(81.89,92.1)
  Bottom Layer w0.254: v1(81.89,92.1) 83.839,94.05 R15.2
GND: C1.2 C2.2 C5.2 C8.1 C9.2 C10.2 C11.1 C21.2 C22.2 C24.2 C25.2 C26.2 C27.2 C28.2 C29.2 C30.2 C31.2 DA2.2 DD1.8 DD1.23 DD1.35 DD1.47 DD2.4 DD3.4 DD4.4 DD5.15 DD6.4 R6.1 R12.1 R13.1 R23.1 R26.1 R29.1 VD5.1 VD6.1 VT2.3 VT4.3 VT6.3 X2.5 | length 529.1
  Top Layer w0.254: C31.2 44.25,56.109 44.5,56.359 C30.2 38.481,68.019 38.481,74.93 38.786,75.235 42.195,75.235 42.5,74.93 C11.1 C5.2 47.2,78.257 47.7,78.757 C8.1 48.641,83.537 48.641,84.582 49.225,85.166 49.225,94.437 v1(51.394,96.606) ; v1(50.8,101.829) 51.304,101.325 DD5.15 ; C24.2 61.405,72.655 DD6.4 ; v1(62.039,44) 63.5,44 ; v1(62.89,41.3) 62.89,43.39 63.5,44 ; C25.2 63.5,44 ; R12.1 67.323,80.823 71.044,80.823 74.471,84.25 ; v1(75.626,34.257) 74.5,35.382 DA2.2 75.73,41.23 VD5.1 VD6.1 ; DD1.47 79.75,90.17 79.42,90.5 74.676,90.5 71.984,87.808 71.984,85.344 73.078,84.25 74.471,84.25 ; DD1.23 84.25,82.321 82.753,83.818 82.753,85.675 84.328,87.25 ; DD4.4 82.88,51.595 80.518,53.957 80.518,61 C22.2 77.23,61 VD6.1 ; DD1.35 84.328,87.25 ; v1(93.98,76.276) 95.504,74.752 95.504,65.5 C10.2 ; v1(94,79.458) R13.1 ; v1(95.123,99.517) 95.123,94.056 93.37,92.304 93.37,86.868 93.632,86.868 R13.1 ; v1(95.588,84.912) R13.1 ; DD3.4 v1(102.427,76.095) ; DD2.4 v1(102.794,93.42) ; VT6.3 112.5,37.043 111.645,37.898 111.645,53.185 VT4.3 ; C28.2 C21.2 C9.2 C1.2 ; 74.471,84.25 75.69,84.25 ; 75.69,84.25 DD1.8 79.399,84.226 80.62,84.226 83.643,87.25 84.328,87.25 ; 75.69,84.25 73.965,82.525 73.965,71.298 75.997,69.266 75.997,68.072 74.346,66.421 74.346,60.884 VD6.1
  Bottom Layer w0.254: C31.2 44.75,51 50.517,51 ; C30.2 50.75,68.25 C24.2 ; v1(50.8,101.829) 38.784,101.829 X2.5 48.156,99.885 50.5,97.541 R6.1 v1(51.394,96.606) ; R29.1 51.225,50.292 50.517,51 ; v1(62.039,44) 61.42,43.381 61.42,40.405 62.1,39.725 C26.2 ; v1(62.89,41.3) 73.2,41.3 DA2.2 ; VD5.1 74.224,51.994 57.244,51.994 C27.2 50.517,51 ; C29.2 80.6,34.257 v1(75.626,34.257) 77.751,32.131 96.087,32.131 98.5,34.544 R26.1 110.5,35 VT6.3 ; v1(93.98,76.276) v1@93.98,79.458 ; v1(94,79.458) v1@93.98,79.458 ; R23.1 93.98,80.5 v1@93.98,79.458 ; v1(95.123,99.517) 95.14,99.5 C2.2 97.5,98.714 v1(102.794,93.42) ; v1(95.588,84.912) 115.088,84.912 VT2.3 ; v1(102.427,76.095) 106.143,76.095 111.048,81 VT2.3 ; VT4.3 116.79,54.54 C28.2 ; C21.2 128.25,81 VT2.3
NetBQ1_1: BQ1.1 C14.1 DD1.5 | length 21.5
  Top Layer w0.254: v1(76.276,85.75) DD1.5
  Bottom Layer w0.254: BQ1.1 78.232,96.2 78.5,95.932 C14.1 78.5,87.974 v1(76.276,85.75)
NetBQ1_3: BQ1.3 C15.1 DD1.6 | length 38
  Top Layer w0.254: DD1.6 v1(79.629,85.25)
  Bottom Layer w0.254: BQ1.3 67.64,98.8 68.713,99.873 71.485,99.873 74.612,103 80.699,103 ; v1(79.629,85.25) 80.464,86.085 80.464,102.765 80.699,103 ; C15.1 80.699,103
NetC3_1: C3.1 DD2.8 VD1.2 | length 13.4
  Top Layer w0.254: VD1.2 105.5,102.5 106.6,101.4 DD2.8 109.017,97.23 109.362,97.575 C3.1
NetC3_2: C3.2 DD2.6 R2.1 VT1.3 VT2.2 X3.1 | length 93
  Top Layer w0.254: DD2.6 109.118,94.69 109.233,94.575 C3.2 C3.2@112.575,94.575 ; VT1.3 112.46,101.84 114,100.3 114,96 C3.2@112.575,94.575 ; v1(117.526,95.225) 117.1,94.799 R2.1 116.475,94.575 C3.2@112.575,94.575 ; VT2.2 126.213,71.247 126.213,50.287 X3.1
  Bottom Layer w0.254: v1(117.526,95.225) 130.835,81.915 130.835,78.689 130.556,78.41 125.197,78.41 125.146,78.46 VT2.2
NetC4_1: C4.1 DD5.2 | length 38.2
  Top Layer w0.254: v1(56.236,101.752) 56.663,101.325 DD5.2
  Bottom Layer w0.254: C4.1 50.14,83.812 50.14,93.98 50.444,94.284 51.558,94.284 53.184,95.91 53.184,98.044 52.292,98.936 52.292,106.144 53.818,107.671 56.896,107.671 57.277,107.29 57.277,103.2 56.236,102.159 v1(56.236,101.752)
NetC6_1: C6.1 DD5.1 | length 5.4
  Top Layer w0.254: DD5.1 60.122,100.055 60.492,100.425 C6.1
NetC6_2: C6.2 DD5.3 | length 5.4
  Top Layer w0.254: DD5.3 60.096,102.595 60.526,103.025 C6.2
NetC7_1: C7.1 DD5.4 | length 7.6
  Top Layer w0.254: DD5.4 59.652,103.865 63,107.213 C7.1
NetC7_2: C7.2 DD5.5 | length 8.3
  Top Layer w0.254: DD5.5 58.551,105.135 58.826,105.41 58.826,106.494 63,110.668 C7.2
NetC8_2: C8.2 DD5.6 | length 29.8
  Top Layer w0.254: C8.2 51.816,83.537 53.264,84.985 53.264,94.164 v1(53.638,94.539) ; v1(56.236,106.401) 56.24,106.405 DD5.6
  Bottom Layer w0.254: v1(53.638,94.539) 53.638,98.85 52.746,99.743 52.746,105.299 53.848,106.401 v1(56.236,106.401)
NetC12_1: C12.1 DD3.8 VD2.2 | length 17.4
  Top Layer w0.254: VD2.2 105.05,81.08 DD3.8 109.459,79.905 109.818,80.264 111.85,80.264 v1(113.614,78.5)
  Bottom Layer w0.254: C12.1 v1(113.614,78.5)
NetC12_2: C12.2 DD3.6 R11.1 VT3.3 VT4.2 X3.2 | length 64
  Top Layer w0.254: DD3.6 107.885,77.365 R11.1 ; v1(109.398,74.725) R11.1 ; VT4.2 114.249,53.249 ; VT3.3 118.04,57.04 114.249,53.249 ; R11.1 110.525,59.096 114.249,55.372 114.249,53.249
  Bottom Layer w0.254: v1(109.398,74.725) 109.398,75.184 109.714,75.5 C12.2 ; VT4.2 120.726,52 121.226,52.5 X3.2
NetC16_1: C16.1 DD1.9 | length 20.8
  Top Layer w0.254: DD1.9 79.394,83.75 v1(80.137,83.007)
  Bottom Layer w0.254: v1(80.137,83.007) 88.392,91.262 90.247,91.262 92.05,89.459 C16.1
NetC23_1: C23.1 DD4.8 VD3.2 | length 21
  Top Layer w0.254: VD3.2 90.1,57.175 ; DD4.8 90.1,55.53 90.1,57.175 ; v1(99.212,57.175) 90.1,57.175
  Bottom Layer w0.254: v1(99.212,57.175) 100.388,56 C23.1
NetC23_2: C23.2 DD4.6 R22.1 VT5.3 VT6.2 X3.3 | length 79.1
  Top Layer w0.254: DD4.6 93.835,52.865 R22.1 95.15,50.8 95.658,50.292 97.663,50.292 v1(100.371,53) ; v1(106.375,53) 108.5,50.875 108.5,39 109.96,37.54 VT6.2 ; X3.3 131,55.5 131,43.5 130,42.5 VT5.3
  Bottom Layer w0.254: v1(100.371,53) C23.2 v1(106.375,53) ; VT6.2 111.212,38.252 128.748,38.252 VT5.3
NetC24_1: C24.1 C25.1 DA2.1 VD4.2 | length 47.9
  Top Layer w0.254: v1(62.89,46.888) v1@63.002,47 ; C25.1 v1@63.002,47 ; VD4.2 63.5,63.73 63.5,47.498 v1@63.002,47
  Bottom Layer w0.254: C24.1 57.75,65.5 VD4.2 ; v1(62.89,46.888) 63.906,45.872 63.906,43.993 61.874,41.961 61.874,40.64 62.23,40.284 66.949,40.284 DA2.1
NetC31_1: C31.1 L1.2 | length 20.7
  Bottom Layer w0.254: C31.1 47.724,44.526 51.562,44.526 56.863,39.225 L1.2
NetC32_1: C32.1 DA1.1 R28.1 R30.2 | length 45.1
  Top Layer w0.254: R30.2 29.5,40 28.5,41 28.5,48 30,49.5 C32.1 ; DA1.1 30.215,50.285 C32.1 ; v1(51.994,55.753) 45.741,49.5 C32.1
  Bottom Layer w0.254: R28.1 51.994,56.506 v1(51.994,55.753)
NetC32_2: C32.2 C33.2 R29.2 R30.1 R31.1 | length 40.9
  Top Layer w0.254: C32.2 33.528,46.5 34.8,45.228 R30.1 37.841,40 38.938,41.097 43.403,41.097 C33.2 50.225,45.725 v1(50.225,47.371)
  Bottom Layer w0.254: C33.2 46.7,37.8 R31.1 ; v1(50.225,47.371) R29.2
NetC33_1: C33.1 L1.1 R31.2 VD6.2 VT7.3 | length 94.9
  Top Layer w0.254: v1(55.514,37.425) 55.514,40.096 60.909,45.491 66.04,45.491 66.7,46.152 66.7,58.07 VD6.2
  Bottom Layer w0.254: VT7.3 33.376,73.77 37.499,69.647 63.932,69.647 66.675,66.904 66.675,60.905 VD6.2 ; C33.1 43.529,41.529 49.246,41.529 R31.2 55.074,38.8 56.449,37.425 ; v1(55.514,37.425) 56.449,37.425 ; L1.1 56.449,37.425
NetDA1_3: DA1.3 R27.2 VT7.2 | length 45.4
  Top Layer w0.254: VT7.2 34.544,72.5 36.5,70.544 36.5,58.954 34.785,57.239 DA1.3
  Bottom Layer w0.254: VT7.2 33.401,72.5 42.113,63.788 42.113,62.255 43.459,60.909 45.034,60.909 45.593,61.468 45.593,61.593 R27.2
NetDA3_2: DA3.2 R25.1 R26.2 | length 11.2
  Bottom Layer w0.254: DA3.2 91,37.033 91.5,36.533 R25.1 R26.2
NetDD2_5: DD2.5 R5.1 | length 7.6
  Top Layer w0.254: DD2.5 109.728,93.42 111,92.148 R5.1
NetDD2_7: DD2.7 R1.1 | length 13.3
  Top Layer w0.254: DD2.7 v1(108.255,95.961) v1(108.255,95.961) ; v1(115.041,89.175) R1.1
  Bottom Layer w0.254: v1(108.255,95.961) v1(115.041,89.175)
NetDD3_5: DD3.5 R14.1 | length 7.8
  Top Layer w0.254: R14.1 105,76.095 DD3.5
NetDD3_7: DD3.7 R9.1 | length 4.7
  Top Layer w0.254: DD3.7 109.935,78.635 R9.1
NetDD4_5: DD4.5 R24.1 | length 29.4
  Top Layer w0.254: v1(87.173,56.413) 88.9,54.686 88.9,51.849 89.154,51.595 DD4.5 ; v1(91.457,45.5) R24.1
  Bottom Layer w0.254: v1(87.173,56.413) 85.42,54.661 85.42,51.537 v1(91.457,45.5)
NetDD4_7: DD4.7 R21.1 | length 5.8
  Top Layer w0.254: DD4.7 93.26,54.135 R21.1
NetDD5_13: DD5.13 R6.2 X2.3 | length 28.7
  Top Layer w0.254: v1(50.8,103.865) DD5.13
  Bottom Layer w0.254: X2.3 39.995,97.5 R6.2 49.5,96.652 50.648,95.504 51.968,95.504 52.73,96.266 52.73,97.536 51.816,98.45 51.816,102.849 v1(50.8,103.865)
NetDD5_14: DD5.14 X2.2 | length 40.9
  Top Layer w0.254: X2.2 39,93.735 39,110.424 39.549,110.973 47.244,110.973 47.879,110.338 47.879,103.124 48.158,102.845 51.312,102.845 51.562,102.595 DD5.14
NetDD6_5: DD6.5 X6.2 | length 40.8
  Top Layer w0.254: DD6.5 61.405,86.589 63.424,88.607 63.424,93.751 65.172,95.5 77.5,95.5 X6.2
NetDD6_6: DD6.6 X6.1 | length 53.3
  Top Layer w0.254: DD6.6 60.135,88.557 58.344,90.348 58.344,94.488 60.856,97 75.5,97 87,108.5 90.5,108.5 X6.1
NetDD6_7: DD6.7 R12.2 X5.2 | length 58.1
  Top Layer w0.254: v1(58.877,81.407) 58.865,81.419 DD6.7 58.865,88.252 55.804,91.313 55.804,95.606 57.682,97.484 74.484,97.484 77.826,100.826 77.826,102.616 76.632,103.81 75.69,103.81 X5.2 ; R12.2 67.361,81.861 v1(67.361,83.083)
  Bottom Layer w0.254: v1(58.877,81.407) 60.554,83.083 v1(67.361,83.083)
NetDD6_8: DD6.8 R10.1 X5.1 | length 108.5
  Top Layer w0.254: DD6.8 57.595,85.408 v1(57.607,85.42)
  Bottom Layer w0.254: v1(57.607,85.42) 53.899,81.712 49.784,81.712 48.641,82.855 48.641,85.344 47.955,86.03 44.704,86.03 43.5,84.826 R10.1 32.868,88.632 32.868,100.609 44.755,112.497 72.003,112.497 X5.1
NetR1_2: R1.2 R2.2 VT1.1 | length 17.5
  Top Layer w0.254: VT1.1 119.888,102.652 119.888,95.738 R2.2 118.1,91.567 118.125,91.542 R1.2
NetR5_2: R5.2 VT2.1 | length 40.8
  Top Layer w0.254: R5.2 114.63,86.87 114.63,75.997 114.249,75.616 114.249,64.821 114.808,64.262 116.027,64.262 116.789,65.024 116.789,73.709 VT2.1
NetR7_2: R7.2 R32.1 | length 12
  Bottom Layer w0.254: R7.2 62.55,110.236 63.337,111.023 65.202,111.023 69,107.225 R32.1
NetR9_2: R9.2 R11.2 VT3.1 | length 14.5
  Top Layer w0.254: R9.2 111.65,77.087 111.525,76.962 R11.2 112.96,73.29 VT3.1
NetR14_2: R14.2 VT4.1 | length 52.9
  Top Layer w0.254: R14.2 107.975,67.525 107.975,53.025 110,51 110,38.858 111.269,37.589 111.269,35.746 111.76,35.255 112.928,35.255 114,36.327 114,48 113,49 VT4.1
NetR19_1: R19.1 X1.5 | length 69.6
  Bottom Layer w0.254: X1.5 60.904,91.364 53.848,91.364 53.264,91.948 53.264,93.421 53.035,93.65 50.724,93.65 50.724,91.364 55.651,86.436 58.039,86.436 58.623,85.852 58.623,83.287 57.766,82.43 57.766,75.66 58.42,75.006 59.195,75.006 62.446,78.257 69.596,78.257 75.971,71.882 83.109,71.882 84.227,73 R19.1
NetR21_2: R21.2 R22.2 VT5.1 | length 56.6
  Top Layer w0.254: R22.2 96.15,53.772 96.2,53.822 v1(96.2,54.117) R21.2
  Bottom Layer w0.254: v1(96.2,54.117) 99.619,50.698 120.548,50.698 131.242,40.005 131.242,36.068 130.658,35.484 126.436,35.484 VT5.1
NetR24_2: R24.2 VT6.1 | length 11.2
  Top Layer w0.254: R24.2 101,43.42 VT6.1
NRST: C13.1 DD1.7 R8.1 SB1.3 SB1.4 | length 70.8
  Top Layer w0.254: SB1.4 SB1.3 46.75,100.686 59.512,100.686 60.503,101.676 68.072,101.676 68.326,101.93 v1(76.479,101.93) ; v1(73,85.877) 74.168,84.709 76.794,84.709 76.835,84.75 DD1.7
  Bottom Layer w0.254: v1(73,85.877) C13.1 73,91.159 72.904,91.255 69.705,91.255 68.518,92.442 68.518,96.94 69.088,97.511 70.623,97.511 71.183,98.071 71.183,98.62 72.19,99.627 74.941,99.627 75,99.568 R8.1 76.479,100.479 v1(76.479,101.93)
PWM_A: DD1.29 DD2.2 | length 29.2
  Top Layer w0.254: DD1.29 91.391,84.25 v1(91.465,84.176) ; DD2.2 v1(102.794,95.96)
  Bottom Layer w0.254: v1(91.465,84.176) 92.438,84.176 95.562,87.3 102.718,87.3 103.81,88.392 103.81,94.944 v1(102.794,95.96)
PWM_B: DD1.30 DD3.2 R13.2 | length 34.4
  Top Layer w0.254: v1(84.226,84.191) 84.785,84.75 DD1.30 ; R13.2 94.333,87.5 v1(95.098,88.265) ; DD3.2 101.927,78.635 v1(102.438,79.146)
  Bottom Layer w0.254: v1(84.226,84.191) 89.525,84.191 90.449,85.115 ; v1(95.098,88.265) 95.098,87.554 93.142,85.598 90.932,85.598 90.449,85.115 ; v1(102.438,79.146) 102.438,80.061 99.593,82.906 90.856,82.906 90.449,83.312 90.449,85.115
PWM_C: DD1.31 DD4.2 R23.2 | length 53.4
  Top Layer w0.254: DD4.2 86.342,54.135 v1(86.436,54.229) ; DD1.31 91.948,85.25 92.481,84.717 v1(92.481,81.5)
  Bottom Layer w0.254: v1(86.436,54.229) 100.914,68.707 101.905,69.52 101.905,72.771 100.762,73.914 100.762,80.306 99.568,81.5 R23.2 v1(92.481,81.5)
PWM_nSD: DD1.32 DD2.3 DD3.3 DD4.3 | length 136.3
  Top Layer w0.254: v1(84.379,85.75) DD1.32 ; DD4.3 86.487,52.865 87.503,51.849 ; v1(99.111,74.955) v1@99.543,74.524 ; DD2.3 100.19,94.69 99.5,94 99.5,91.914 103.454,87.96 103.454,78.203 102.616,77.365 DD3.3 99.72,77.365 99.543,77.187 v1@99.543,74.524 ; 87.503,51.849 89.822,49.53 100,49.53 101.397,50.927 101.397,59.436 ; 87.503,51.849 87.503,49.784 89.129,48.158 98.662,48.158 101.422,50.919 101.422,59.411 101.397,59.436 ; v1@99.543,74.524 101.397,72.669 101.397,59.436 ; v1@99.543,74.524 99.543,61.29 101.397,59.436
  Bottom Layer w0.254: v1(84.379,85.75) 84.252,85.75 83.21,84.709 83.21,83.033 84.328,81.915 85.319,81.915 92.278,74.955 v1(99.111,74.955)
SWCLK: DD1.37 R17.1 X1.2 | length 66.9
  Top Layer w0.254: X1.2 54.42,77.973 v1(58.894,73.5) ; v1(63.398,75.463) 64.589,76.654 64.589,88.486 70.21,94.107 82.632,94.107 84.75,91.989 DD1.37
  Bottom Layer w0.254: v1(58.894,73.5) R17.1 63.398,73.898 v1(63.398,75.463)
SWDIO: DD1.34 R18.1 X1.4 | length 104.7
  Top Layer w0.254: X1.4 63.2,96.2 76.159,96.2 87.459,107.5 89,107.5 90.068,106.432 90.068,88.392 88.426,86.75 ; v1(80.797,70.79) 90.373,70.79 91.872,72.288 91.872,78.867 93.497,80.493 93.497,85.801 92.549,86.75 88.426,86.75 ; DD1.34 88.426,86.75
  Bottom Layer w0.254: R18.1 70.891,75.109 70.891,74.422 74.524,70.79 v1(80.797,70.79)
SWO: DD1.39 R20.1 X1.6 | length 86.6
  Top Layer w0.254: X1.6 64.58,90.158 64.135,89.713 64.135,78.105 62.382,76.352 62.382,70.104 63.983,68.504 71.78,68.504 ; DD1.39 83.75,91.866 82.296,93.32 70.666,93.32 66.345,88.998 66.345,73.939 71.78,68.504 ; 71.78,68.504 71.784,68.5 v1(74.981,68.5) 74.977,68.504 71.78,68.504
  Bottom Layer w0.254: R20.1 v1(74.981,68.5)
USART1_RX: DD1.22 DD6.2 | length 31.2
  Top Layer w0.254: v1(58.865,76.505) DD6.2 ; v1(82.753,77.775) 83.75,78.772 DD1.22
  Bottom Layer w0.254: v1(58.865,76.505) 61.583,79.223 72.314,79.223 73.762,77.775 v1(82.753,77.775)
USART1_TX: DD1.21 DD6.3 | length 29.5
  Top Layer w0.254: DD6.3 60.135,80.506 v1(60.147,80.518) ; v1(81.737,83.083) 82.245,83.083 83.25,82.079 DD1.21
  Bottom Layer w0.254: v1(60.147,80.518) 69.266,80.518 70.028,79.756 72.796,79.756 74.168,78.384 77.038,78.384 v1(81.737,83.083)
USART2_RX: DD1.46 DD5.12 | length 42.8
  Top Layer w0.254: DD5.12 v1(54.28,105.135) ; v1(68.021,88.189) 72.06,92.227 79.146,92.227 80.25,91.124 DD1.46
  Bottom Layer w0.254: v1(54.28,105.135) 54.28,101.752 61.874,94.158 64.886,94.158 68.021,91.023 v1(68.021,88.189)
USART2_TX: DD1.45 DD5.11 R7.1 | length 65.6
  Top Layer w0.254: v1(50.8,106.405) DD5.11 ; v1(71.882,90.221) 68.834,87.173 67.564,87.173 67.005,87.732 67.005,88.646 71.095,92.735 79.302,92.735 80.75,91.288 DD1.45
  Bottom Layer w0.254: v1(50.8,106.405) 52.929,108.534 62.484,108.534 63.17,109.22 63.17,109.445 R7.1 63.55,96.521 69.85,90.221 v1(71.882,90.221)
pads on no net: BQ1.2 BQ1.4 C2.0 C3.0 C4.0 C5.0 C6.0 C7.0 C8.0 C10.0 C11.0 C12.0 C13.0 C13.2 C14.0 C14.2 C15.0 C15.2 C16.0 C17.0 C17.2 C18.0 C18.2 C19.0 C19.2 C20.0 C20.2 C22.0 C23.0 C25.0 C26.0 C29.0 C32.0 DD1.0 DD1.2 DD1.3 DD1.4 DD1.10 DD1.11 DD1.12 DD1.13 DD1.14 DD1.15 DD1.16 DD1.17 DD1.18 DD1.19 DD1.25 DD1.26 DD1.27 DD1.28 DD1.33 DD1.38 DD1.40 DD1.41 DD1.42 DD1.43 DD5.7 DD5.8 DD5.9 DD5.10 L1.0 R1.0 R2.0 R3.0 R3.1 R3.2 R4.0 R4.1 R4.2 R5.0 R6.0 R7.0 R8.0 R9.0 R10.0 R11.0 R12.0 R13.0 R14.0 R15.0 R15.1 R16.0 R16.1 R17.0 R18.0 R19.0 R20.0 R21.0 R22.0 R23.0 R24.0 R25.0 R26.0 R27.0 R28.0 R29.0 R30.0 R31.0 R32.0 SB1.1 SB1.2 VD1.0 VD2.0 VD3.0 X1.3 X2.1 X2.4 X2.6 X2.7 X2.8 X2.9 X2.Z1 X2.Z2

## Silkscreen, mask and mechanical layers (free items; w line width, h text height)
Mechanical 1:
  lines w1.2: 25.5,38 25.5,32.5 26.5,31.5 131.5,31.5 136.5,31.5 137.5,32.5 137.5,114.5 137,115 26,115 25.5,114.5 25.5,38 ; 25.5,38 25.5,38

## Text inside footprints (layer, text, board x,y; h text height)
C1: Top Overlay "+" at 122.675,103.263 h1.5
C9: Top Overlay "+" at 122.675,91.263 h1.5
C21: Top Overlay "+" at 122.675,78.763 h1.5
C24: Top Overlay "+" at 57.737,61.175 h1.5 r90
C27: Top Overlay "+" at 61.975,51.737 h1.5 r180
C28: Top Overlay "+" at 124.025,66.763 h1.5
C30: Top Overlay "+" at 37.425,61.263 h1.5
C31: Top Overlay "+" at 38.525,49.763 h1.5
C33: Top Overlay "+" at 38.775,39.263 h1.5
X1: Top Overlay "1" at 49.88,92 h1
X2: Bottom Overlay "1" at 36.02,86.745 h1.27 r270; Bottom Overlay "9" at 33.32,100.145 h1.27 r270